# Altium PCB AVR最小系统板.PcbDoc (part 3 of 3)
Units mm, origin at the board's own origin, x right, y up, seen from the top; angles counter-clockwise.
Board outline 152.4 x 101.6 mm, 2 copper layers (Top Layer, Bottom Layer); 29 components, 54 nets, 170 pads, 0 vias.
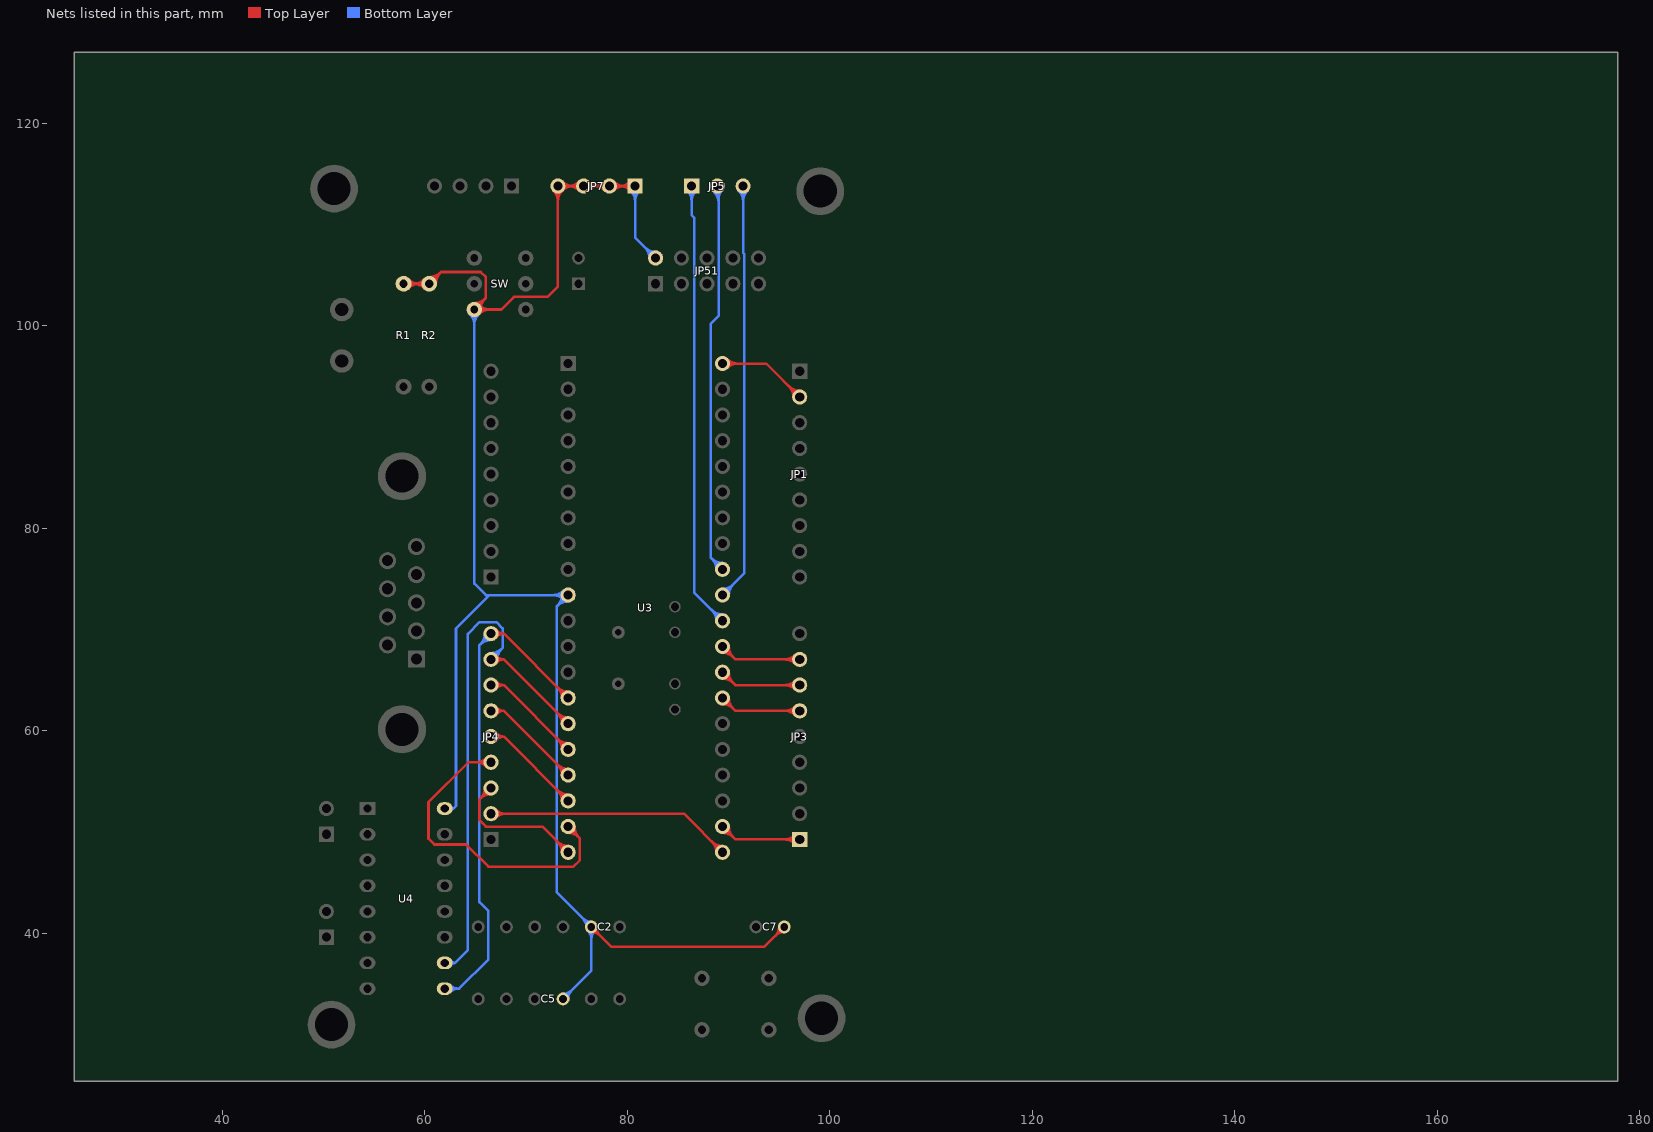
[diagram p3: the nets of this part, all layers, seen from the top]

## Nets (pads, with @x,y where several pads share a name; then routed paths per layer and width w, separated by ;. In a path a pad name is that pad's centre, name@x,y a point inside that pad or via, vN(x,y) a via of type N, cw(c..) or ccw(c..) an arc to the next point about the centre after c; other vN are vias at no path point) (continued)
NetJP3_6: JP3.6 U3.27 | length 30.7
  Top Layer w0.254: U3.27@89.408,63.246 90.678,61.976 JP3.6@97.028,61.976 ; U3.27@89.408,62.623 cw(c89.408,61.119) 90.472,62.182 ; U3.27@89.408,62.623 cw(c89.408,61.119) 90.472,62.182 ; U3.27@89.408,62.623 cw(c89.408,61.119) 90.472,62.182 ; U3.27@89.408,62.877 cw(c89.408,61.986) 90.038,62.616 ; U3.27@89.408,62.877 cw(c89.408,61.986) 90.038,62.616 ; U3.27@89.408,62.877 cw(c89.408,61.986) 90.038,62.616 ; U3.27@89.777,63.246 ccw(c90.668,63.246) 90.038,62.616 ; U3.27@89.777,63.246 ccw(c90.668,63.246) 90.038,62.616 ; U3.27@89.777,63.246 ccw(c90.668,63.246) 90.038,62.616 ; U3.27@90.031,63.246 ccw(c91.535,63.246) 90.472,62.182 ; U3.27@90.031,63.246 ccw(c91.535,63.246) 90.472,62.182 ; U3.27@90.031,63.246 ccw(c91.535,63.246) 90.472,62.182 ; 95.524,61.976 cw(c95.524,60.472) JP3.6@96.587,61.535 ; 95.524,61.976 ccw(c95.524,63.48) JP3.6@96.587,62.417 ; 95.524,61.976 cw(c95.524,60.472) JP3.6@96.587,61.535 ; 95.524,61.976 ccw(c95.524,63.48) JP3.6@96.587,62.417 ; 95.524,61.976 cw(c95.524,60.472) JP3.6@96.587,61.535 ; 95.524,61.976 ccw(c95.524,63.48) JP3.6@96.587,62.417 ; 96.137,61.976 cw(c96.137,61.085) JP3.6@96.767,61.715 ; 96.137,61.976 ccw(c96.137,62.867) JP3.6@96.767,62.237 ; 96.137,61.976 cw(c96.137,61.085) JP3.6@96.767,61.715 ; 96.137,61.976 ccw(c96.137,62.867) JP3.6@96.767,62.237 ; 96.137,61.976 cw(c96.137,61.085) JP3.6@96.767,61.715 ; 96.137,61.976 ccw(c96.137,62.867) JP3.6@96.767,62.237
NetJP3_7: JP3.7 U3.28 | length 30.7
  Top Layer w0.254: U3.28@89.408,65.786 90.678,64.516 JP3.7@97.028,64.516 ; U3.28@89.408,65.163 cw(c89.408,63.659) 90.472,64.722 ; U3.28@89.408,65.163 cw(c89.408,63.659) 90.472,64.722 ; U3.28@89.408,65.163 cw(c89.408,63.659) 90.472,64.722 ; U3.28@89.408,65.417 cw(c89.408,64.526) 90.038,65.156 ; U3.28@89.408,65.417 cw(c89.408,64.526) 90.038,65.156 ; U3.28@89.408,65.417 cw(c89.408,64.526) 90.038,65.156 ; U3.28@89.777,65.786 ccw(c90.668,65.786) 90.038,65.156 ; U3.28@89.777,65.786 ccw(c90.668,65.786) 90.038,65.156 ; U3.28@89.777,65.786 ccw(c90.668,65.786) 90.038,65.156 ; U3.28@90.031,65.786 ccw(c91.535,65.786) 90.472,64.722 ; U3.28@90.031,65.786 ccw(c91.535,65.786) 90.472,64.722 ; U3.28@90.031,65.786 ccw(c91.535,65.786) 90.472,64.722 ; 95.524,64.516 cw(c95.524,63.012) JP3.7@96.587,64.075 ; 95.524,64.516 ccw(c95.524,66.02) JP3.7@96.587,64.957 ; 95.524,64.516 cw(c95.524,63.012) JP3.7@96.587,64.075 ; 95.524,64.516 ccw(c95.524,66.02) JP3.7@96.587,64.957 ; 95.524,64.516 cw(c95.524,63.012) JP3.7@96.587,64.075 ; 95.524,64.516 ccw(c95.524,66.02) JP3.7@96.587,64.957 ; 96.137,64.516 cw(c96.137,63.625) JP3.7@96.767,64.255 ; 96.137,64.516 ccw(c96.137,65.407) JP3.7@96.767,64.777 ; 96.137,64.516 cw(c96.137,63.625) JP3.7@96.767,64.255 ; 96.137,64.516 ccw(c96.137,65.407) JP3.7@96.767,64.777 ; 96.137,64.516 cw(c96.137,63.625) JP3.7@96.767,64.255 ; 96.137,64.516 ccw(c96.137,65.407) JP3.7@96.767,64.777
NetJP4_2: JP4.2 U3.21 | length 47
  Top Layer w0.254: JP4.2@66.548,51.816 85.598,51.816 U3.21@89.408,48.006 ; JP4.2@66.809,51.555 cw(c67.439,50.925) 67.439,51.816 ; JP4.2@66.809,51.555 cw(c67.439,50.925) 67.439,51.816 ; JP4.2@66.809,51.555 cw(c67.439,50.925) 67.439,51.816 ; JP4.2@66.809,52.077 ccw(c67.439,52.707) 67.439,51.816 ; JP4.2@66.809,52.077 ccw(c67.439,52.707) 67.439,51.816 ; JP4.2@66.809,52.077 ccw(c67.439,52.707) 67.439,51.816 ; JP4.2@66.989,51.375 cw(c68.052,50.312) 68.052,51.816 ; JP4.2@66.989,51.375 cw(c68.052,50.312) 68.052,51.816 ; JP4.2@66.989,51.375 cw(c68.052,50.312) 68.052,51.816 ; JP4.2@66.989,52.257 ccw(c68.052,53.32) 68.052,51.816 ; JP4.2@66.989,52.257 ccw(c68.052,53.32) 68.052,51.816 ; JP4.2@66.989,52.257 ccw(c68.052,53.32) 68.052,51.816 ; 88.344,49.07 cw(c87.281,48.006) U3.21@88.785,48.006 ; 88.344,49.07 ccw(c89.408,50.133) U3.21@89.408,48.629 ; 88.344,49.07 cw(c87.281,48.006) U3.21@88.785,48.006 ; 88.344,49.07 ccw(c89.408,50.133) U3.21@89.408,48.629 ; 88.344,49.07 cw(c87.281,48.006) U3.21@88.785,48.006 ; 88.344,49.07 ccw(c89.408,50.133) U3.21@89.408,48.629 ; 88.778,48.636 cw(c88.148,48.006) U3.21@89.039,48.006 ; 88.778,48.636 ccw(c89.408,49.266) U3.21@89.408,48.375 ; 88.778,48.636 cw(c88.148,48.006) U3.21@89.039,48.006 ; 88.778,48.636 ccw(c89.408,49.266) U3.21@89.408,48.375 ; 88.778,48.636 cw(c88.148,48.006) U3.21@89.039,48.006 ; 88.778,48.636 ccw(c89.408,49.266) U3.21@89.408,48.375
NetJP4_3: JP4.3 U3.20 | length 36.3
  Top Layer w0.254: JP4.3@66.548,54.356 65.405,53.213 65.405,51.181 66.04,50.546 71.628,50.546 U3.20@74.168,48.006 ; 65.484,53.292 cw(c66.548,52.229) JP4.3@66.548,53.733 ; 65.484,53.292 ccw(c64.421,54.356) JP4.3@65.925,54.356 ; 65.484,53.292 cw(c66.548,52.229) JP4.3@66.548,53.733 ; 65.484,53.292 ccw(c64.421,54.356) JP4.3@65.925,54.356 ; 65.484,53.292 cw(c66.548,52.229) JP4.3@66.548,53.733 ; 65.484,53.292 ccw(c64.421,54.356) JP4.3@65.925,54.356 ; 65.918,53.726 cw(c66.548,53.096) JP4.3@66.548,53.987 ; 65.918,53.726 ccw(c65.288,54.356) JP4.3@66.179,54.356 ; 65.918,53.726 cw(c66.548,53.096) JP4.3@66.548,53.987 ; 65.918,53.726 ccw(c65.288,54.356) JP4.3@66.179,54.356 ; 65.918,53.726 cw(c66.548,53.096) JP4.3@66.548,53.987 ; 65.918,53.726 ccw(c65.288,54.356) JP4.3@66.179,54.356 ; 73.104,49.07 cw(c72.041,48.006) U3.20@73.545,48.006 ; 73.104,49.07 ccw(c74.168,50.133) U3.20@74.168,48.629 ; 73.104,49.07 cw(c72.041,48.006) U3.20@73.545,48.006 ; 73.104,49.07 ccw(c74.168,50.133) U3.20@74.168,48.629 ; 73.104,49.07 cw(c72.041,48.006) U3.20@73.545,48.006 ; 73.104,49.07 ccw(c74.168,50.133) U3.20@74.168,48.629 ; 73.538,48.636 cw(c72.908,48.006) U3.20@73.799,48.006 ; 73.538,48.636 ccw(c74.168,49.266) U3.20@74.168,48.375 ; 73.538,48.636 cw(c72.908,48.006) U3.20@73.799,48.006 ; 73.538,48.636 ccw(c74.168,49.266) U3.20@74.168,48.375 ; 73.538,48.636 cw(c72.908,48.006) U3.20@73.799,48.006 ; 73.538,48.636 ccw(c74.168,49.266) U3.20@74.168,48.375
NetJP4_4: JP4.4 U3.19 | length 54.1
  Top Layer w0.254: JP4.4@66.548,56.896 64.313,56.896 60.376,52.959 60.376,49.352 60.951,48.777 64.101,48.777 66.294,46.584 74.676,46.584 75.311,47.219 75.311,49.403 U3.19@74.168,50.546 ; 65.044,56.896 cw(c65.044,55.392) JP4.4@66.107,56.455 ; 65.044,56.896 ccw(c65.044,58.4) JP4.4@66.107,57.337 ; 65.044,56.896 cw(c65.044,55.392) JP4.4@66.107,56.455 ; 65.044,56.896 ccw(c65.044,58.4) JP4.4@66.107,57.337 ; 65.044,56.896 cw(c65.044,55.392) JP4.4@66.107,56.455 ; 65.044,56.896 ccw(c65.044,58.4) JP4.4@66.107,57.337 ; 65.657,56.896 cw(c65.657,56.005) JP4.4@66.287,56.635 ; 65.657,56.896 ccw(c65.657,57.787) JP4.4@66.287,57.157 ; 65.657,56.896 cw(c65.657,56.005) JP4.4@66.287,56.635 ; 65.657,56.896 ccw(c65.657,57.787) JP4.4@66.287,57.157 ; 65.657,56.896 cw(c65.657,56.005) JP4.4@66.287,56.635 ; 65.657,56.896 ccw(c65.657,57.787) JP4.4@66.287,57.157 ; U3.19@74.168,49.923 cw(c74.168,48.419) 75.232,49.482 ; U3.19@74.168,49.923 cw(c74.168,48.419) 75.232,49.482 ; U3.19@74.168,49.923 cw(c74.168,48.419) 75.232,49.482 ; U3.19@74.168,50.177 cw(c74.168,49.286) 74.798,49.916 ; U3.19@74.168,50.177 cw(c74.168,49.286) 74.798,49.916 ; U3.19@74.168,50.177 cw(c74.168,49.286) 74.798,49.916 ; U3.19@74.537,50.546 ccw(c75.428,50.546) 74.798,49.916 ; U3.19@74.537,50.546 ccw(c75.428,50.546) 74.798,49.916 ; U3.19@74.537,50.546 ccw(c75.428,50.546) 74.798,49.916 ; U3.19@74.791,50.546 ccw(c76.295,50.546) 75.232,49.482 ; U3.19@74.791,50.546 ccw(c76.295,50.546) 75.232,49.482 ; U3.19@74.791,50.546 ccw(c76.295,50.546) 75.232,49.482
NetJP4_5: JP4.5 U3.18 | length 30.1
  Top Layer w0.254: JP4.5@66.548,59.436 67.818,59.436 ; U3.18@74.168,53.086 67.818,59.436 ; JP4.5@66.84,59.21 cw(c67.3,58.854) 67.3,59.436 ; JP4.5@66.84,59.21 cw(c67.3,58.854) 67.3,59.436 ; JP4.5@66.84,59.21 cw(c67.3,58.854) 67.3,59.436 ; JP4.5@66.84,59.662 ccw(c67.3,60.018) 67.3,59.436 ; JP4.5@66.84,59.662 ccw(c67.3,60.018) 67.3,59.436 ; JP4.5@66.84,59.662 ccw(c67.3,60.018) 67.3,59.436 ; JP4.5@67.041,59.055 cw(c67.818,58.453) 67.818,59.436 ; JP4.5@67.041,59.055 cw(c67.818,58.453) 67.818,59.436 ; JP4.5@67.041,59.055 cw(c67.818,58.453) 67.818,59.436 ; JP4.5@67.041,59.817 ccw(c67.818,60.419) 67.818,59.436 ; JP4.5@67.041,59.817 ccw(c67.818,60.419) 67.818,59.436 ; JP4.5@67.041,59.817 ccw(c67.818,60.419) 67.818,59.436 ; 73.104,54.15 cw(c72.041,53.086) U3.18@73.545,53.086 ; 73.104,54.15 ccw(c74.168,55.213) U3.18@74.168,53.709 ; 73.104,54.15 cw(c72.041,53.086) U3.18@73.545,53.086 ; 73.104,54.15 ccw(c74.168,55.213) U3.18@74.168,53.709 ; 73.104,54.15 cw(c72.041,53.086) U3.18@73.545,53.086 ; 73.104,54.15 ccw(c74.168,55.213) U3.18@74.168,53.709 ; 73.538,53.716 cw(c72.908,53.086) U3.18@73.799,53.086 ; 73.538,53.716 ccw(c74.168,54.346) U3.18@74.168,53.455 ; 73.538,53.716 cw(c72.908,53.086) U3.18@73.799,53.086 ; 73.538,53.716 ccw(c74.168,54.346) U3.18@74.168,53.455 ; 73.538,53.716 cw(c72.908,53.086) U3.18@73.799,53.086 ; 73.538,53.716 ccw(c74.168,54.346) U3.18@74.168,53.455
NetJP4_6: JP4.6 U3.17 | length 30.1
  Top Layer w0.254: JP4.6@66.548,61.976 67.818,61.976 ; U3.17@74.168,55.626 67.818,61.976 ; JP4.6@66.84,61.75 cw(c67.3,61.394) 67.3,61.976 ; JP4.6@66.84,61.75 cw(c67.3,61.394) 67.3,61.976 ; JP4.6@66.84,61.75 cw(c67.3,61.394) 67.3,61.976 ; JP4.6@66.84,62.202 ccw(c67.3,62.558) 67.3,61.976 ; JP4.6@66.84,62.202 ccw(c67.3,62.558) 67.3,61.976 ; JP4.6@66.84,62.202 ccw(c67.3,62.558) 67.3,61.976 ; JP4.6@67.041,61.595 cw(c67.818,60.993) 67.818,61.976 ; JP4.6@67.041,61.595 cw(c67.818,60.993) 67.818,61.976 ; JP4.6@67.041,61.595 cw(c67.818,60.993) 67.818,61.976 ; JP4.6@67.041,62.357 ccw(c67.818,62.959) 67.818,61.976 ; JP4.6@67.041,62.357 ccw(c67.818,62.959) 67.818,61.976 ; JP4.6@67.041,62.357 ccw(c67.818,62.959) 67.818,61.976 ; 73.104,56.69 cw(c72.041,55.626) U3.17@73.545,55.626 ; 73.104,56.69 ccw(c74.168,57.753) U3.17@74.168,56.249 ; 73.104,56.69 cw(c72.041,55.626) U3.17@73.545,55.626 ; 73.104,56.69 ccw(c74.168,57.753) U3.17@74.168,56.249 ; 73.104,56.69 cw(c72.041,55.626) U3.17@73.545,55.626 ; 73.104,56.69 ccw(c74.168,57.753) U3.17@74.168,56.249 ; 73.538,56.256 cw(c72.908,55.626) U3.17@73.799,55.626 ; 73.538,56.256 ccw(c74.168,56.886) U3.17@74.168,55.995 ; 73.538,56.256 cw(c72.908,55.626) U3.17@73.799,55.626 ; 73.538,56.256 ccw(c74.168,56.886) U3.17@74.168,55.995 ; 73.538,56.256 cw(c72.908,55.626) U3.17@73.799,55.626 ; 73.538,56.256 ccw(c74.168,56.886) U3.17@74.168,55.995
NetJP4_7: JP4.7 U3.16 | length 30.1
  Top Layer w0.254: JP4.7@66.548,64.516 67.818,64.516 ; U3.16@74.168,58.166 67.818,64.516 ; JP4.7@66.84,64.29 cw(c67.3,63.934) 67.3,64.516 ; JP4.7@66.84,64.29 cw(c67.3,63.934) 67.3,64.516 ; JP4.7@66.84,64.29 cw(c67.3,63.934) 67.3,64.516 ; JP4.7@66.84,64.742 ccw(c67.3,65.098) 67.3,64.516 ; JP4.7@66.84,64.742 ccw(c67.3,65.098) 67.3,64.516 ; JP4.7@66.84,64.742 ccw(c67.3,65.098) 67.3,64.516 ; JP4.7@67.041,64.135 cw(c67.818,63.533) 67.818,64.516 ; JP4.7@67.041,64.135 cw(c67.818,63.533) 67.818,64.516 ; JP4.7@67.041,64.135 cw(c67.818,63.533) 67.818,64.516 ; JP4.7@67.041,64.897 ccw(c67.818,65.499) 67.818,64.516 ; JP4.7@67.041,64.897 ccw(c67.818,65.499) 67.818,64.516 ; JP4.7@67.041,64.897 ccw(c67.818,65.499) 67.818,64.516 ; 73.104,59.23 cw(c72.041,58.166) U3.16@73.545,58.166 ; 73.104,59.23 ccw(c74.168,60.293) U3.16@74.168,58.789 ; 73.104,59.23 cw(c72.041,58.166) U3.16@73.545,58.166 ; 73.104,59.23 ccw(c74.168,60.293) U3.16@74.168,58.789 ; 73.104,59.23 cw(c72.041,58.166) U3.16@73.545,58.166 ; 73.104,59.23 ccw(c74.168,60.293) U3.16@74.168,58.789 ; 73.538,58.796 cw(c72.908,58.166) U3.16@73.799,58.166 ; 73.538,58.796 ccw(c74.168,59.426) U3.16@74.168,58.535 ; 73.538,58.796 cw(c72.908,58.166) U3.16@73.799,58.166 ; 73.538,58.796 ccw(c74.168,59.426) U3.16@74.168,58.535 ; 73.538,58.796 cw(c72.908,58.166) U3.16@73.799,58.166 ; 73.538,58.796 ccw(c74.168,59.426) U3.16@74.168,58.535
NetJP4_8: JP4.8 U3.15 U4.10 | length 86.2
  Top Layer w0.254: JP4.8@66.548,67.056 67.818,67.056 ; U3.15@74.168,60.706 67.818,67.056 ; JP4.8@66.84,66.83 cw(c67.3,66.474) 67.3,67.056 ; JP4.8@66.84,66.83 cw(c67.3,66.474) 67.3,67.056 ; JP4.8@66.84,66.83 cw(c67.3,66.474) 67.3,67.056 ; JP4.8@66.84,67.282 ccw(c67.3,67.638) 67.3,67.056 ; JP4.8@66.84,67.282 ccw(c67.3,67.638) 67.3,67.056 ; JP4.8@66.84,67.282 ccw(c67.3,67.638) 67.3,67.056 ; JP4.8@67.041,66.675 cw(c67.818,66.073) 67.818,67.056 ; JP4.8@67.041,66.675 cw(c67.818,66.073) 67.818,67.056 ; JP4.8@67.041,66.675 cw(c67.818,66.073) 67.818,67.056 ; JP4.8@67.041,67.437 ccw(c67.818,68.039) 67.818,67.056 ; JP4.8@67.041,67.437 ccw(c67.818,68.039) 67.818,67.056 ; JP4.8@67.041,67.437 ccw(c67.818,68.039) 67.818,67.056 ; 73.104,61.77 cw(c72.041,60.706) U3.15@73.545,60.706 ; 73.104,61.77 ccw(c74.168,62.833) U3.15@74.168,61.329 ; 73.104,61.77 cw(c72.041,60.706) U3.15@73.545,60.706 ; 73.104,61.77 ccw(c74.168,62.833) U3.15@74.168,61.329 ; 73.104,61.77 cw(c72.041,60.706) U3.15@73.545,60.706 ; 73.104,61.77 ccw(c74.168,62.833) U3.15@74.168,61.329 ; 73.538,61.336 cw(c72.908,60.706) U3.15@73.799,60.706 ; 73.538,61.336 ccw(c74.168,61.966) U3.15@74.168,61.075 ; 73.538,61.336 cw(c72.908,60.706) U3.15@73.799,60.706 ; 73.538,61.336 ccw(c74.168,61.966) U3.15@74.168,61.075 ; 73.538,61.336 cw(c72.908,60.706) U3.15@73.799,60.706 ; 73.538,61.336 ccw(c74.168,61.966) U3.15@74.168,61.075
  Bottom Layer w0.254: U4.10@61.972,37.083 62.992,37.083 ; JP4.8@66.548,67.056 67.691,68.199 67.691,70.104 67.068,70.727 65.405,70.727 64.262,69.584 64.262,38.353 62.992,37.083 ; U4.10@62.567,36.836 cw(c62.992,36.594) 62.992,37.083 ; U4.10@62.567,36.836 cw(c62.992,36.594) 62.992,37.083 ; U4.10@62.567,36.836 cw(c62.992,36.594) 62.992,37.083 ; U4.10@62.567,37.33 ccw(c62.992,37.572) 62.992,37.083 ; U4.10@62.567,37.33 ccw(c62.992,37.572) 62.992,37.083 ; U4.10@62.567,37.33 ccw(c62.992,37.572) 62.992,37.083 ; JP4.8@66.548,67.425 ccw(c66.548,68.316) 67.178,67.686 ; JP4.8@66.548,67.425 ccw(c66.548,68.316) 67.178,67.686 ; JP4.8@66.548,67.425 ccw(c66.548,68.316) 67.178,67.686 ; JP4.8@66.548,67.679 ccw(c66.548,69.183) 67.612,68.12 ; JP4.8@66.548,67.679 ccw(c66.548,69.183) 67.612,68.12 ; JP4.8@66.548,67.679 ccw(c66.548,69.183) 67.612,68.12 ; JP4.8@66.917,67.056 cw(c67.808,67.056) 67.178,67.686 ; JP4.8@66.917,67.056 cw(c67.808,67.056) 67.178,67.686 ; JP4.8@66.917,67.056 cw(c67.808,67.056) 67.178,67.686 ; JP4.8@67.171,67.056 cw(c68.675,67.056) 67.612,68.12 ; JP4.8@67.171,67.056 cw(c68.675,67.056) 67.612,68.12 ; JP4.8@67.171,67.056 cw(c68.675,67.056) 67.612,68.12
NetJP5_1: JP5.1 U3.30 | length 66.8
  Bottom Layer w0.254: JP5.1@86.36,113.792 86.36,110.922 86.614,110.668 86.614,73.66 U3.30@89.408,70.866 ; JP5.1@85.919,113.351 cw(c84.856,112.288) 86.36,112.288 ; JP5.1@85.919,113.351 cw(c84.856,112.288) 86.36,112.288 ; JP5.1@85.919,113.351 cw(c84.856,112.288) 86.36,112.288 ; JP5.1@86.099,113.531 cw(c85.469,112.901) 86.36,112.901 ; JP5.1@86.099,113.531 cw(c85.469,112.901) 86.36,112.901 ; JP5.1@86.099,113.531 cw(c85.469,112.901) 86.36,112.901 ; 86.36,112.288 cw(c87.864,112.288) JP5.1@86.801,113.351 ; 86.36,112.288 cw(c87.864,112.288) JP5.1@86.801,113.351 ; 86.36,112.288 cw(c87.864,112.288) JP5.1@86.801,113.351 ; 86.36,112.901 cw(c87.251,112.901) JP5.1@86.621,113.531 ; 86.36,112.901 cw(c87.251,112.901) JP5.1@86.621,113.531 ; 86.36,112.901 cw(c87.251,112.901) JP5.1@86.621,113.531 ; 88.344,71.93 cw(c87.281,70.866) U3.30@88.785,70.866 ; 88.344,71.93 ccw(c89.408,72.993) U3.30@89.408,71.489 ; 88.344,71.93 cw(c87.281,70.866) U3.30@88.785,70.866 ; 88.344,71.93 ccw(c89.408,72.993) U3.30@89.408,71.489 ; 88.344,71.93 cw(c87.281,70.866) U3.30@88.785,70.866 ; 88.344,71.93 ccw(c89.408,72.993) U3.30@89.408,71.489 ; 88.778,71.496 cw(c88.148,70.866) U3.30@89.039,70.866 ; 88.778,71.496 ccw(c89.408,72.126) U3.30@89.408,71.235 ; 88.778,71.496 cw(c88.148,70.866) U3.30@89.039,70.866 ; 88.778,71.496 ccw(c89.408,72.126) U3.30@89.408,71.235 ; 88.778,71.496 cw(c88.148,70.866) U3.30@89.039,70.866 ; 88.778,71.496 ccw(c89.408,72.126) U3.30@89.408,71.235
NetJP5_2: JP5.2 U3.32 | length 60.3
  Bottom Layer w0.254: JP5.2@88.9,113.792 89.027,113.792 89.027,100.965 88.265,100.203 88.265,77.089 U3.32@89.408,75.946 ; 88.344,77.01 cw(c87.281,75.946) U3.32@88.785,75.946 ; 88.344,77.01 ccw(c89.408,78.073) U3.32@89.408,76.569 ; 88.344,77.01 cw(c87.281,75.946) U3.32@88.785,75.946 ; 88.344,77.01 ccw(c89.408,78.073) U3.32@89.408,76.569 ; 88.344,77.01 cw(c87.281,75.946) U3.32@88.785,75.946 ; 88.344,77.01 ccw(c89.408,78.073) U3.32@89.408,76.569 ; JP5.2@88.459,113.351 cw(c87.089,111.981) 89.027,111.981 ; JP5.2@88.459,113.351 cw(c87.089,111.981) 89.027,111.981 ; JP5.2@88.459,113.351 cw(c87.089,111.981) 89.027,111.981 ; JP5.2@88.639,113.531 cw(c87.703,112.595) 89.027,112.595 ; JP5.2@88.639,113.531 cw(c87.703,112.595) 89.027,112.595 ; JP5.2@88.639,113.531 cw(c87.703,112.595) 89.027,112.595 ; 88.778,76.576 cw(c88.148,75.946) U3.32@89.039,75.946 ; 88.778,76.576 ccw(c89.408,77.206) U3.32@89.408,76.315 ; 88.778,76.576 cw(c88.148,75.946) U3.32@89.039,75.946 ; 88.778,76.576 ccw(c89.408,77.206) U3.32@89.408,76.315 ; 88.778,76.576 cw(c88.148,75.946) U3.32@89.039,75.946 ; 88.778,76.576 ccw(c89.408,77.206) U3.32@89.408,76.315 ; 89.027,112.595 cw(c90.097,112.595) JP5.2@89.341,113.351 ; 89.027,112.595 cw(c90.097,112.595) JP5.2@89.341,113.351 ; 89.027,112.595 cw(c90.097,112.595) JP5.2@89.341,113.351
NetJP5_3: JP5.3 U3.31 | length 63.9
  Bottom Layer w0.254: U3.31@89.408,73.406 91.567,75.565 91.567,107.061 91.44,107.188 JP5.3@91.44,113.792 ; U3.31@89.408,73.775 ccw(c89.408,74.666) 90.038,74.036 ; U3.31@89.408,73.775 ccw(c89.408,74.666) 90.038,74.036 ; U3.31@89.408,73.775 ccw(c89.408,74.666) 90.038,74.036 ; U3.31@89.408,74.029 ccw(c89.408,75.533) 90.472,74.47 ; U3.31@89.408,74.029 ccw(c89.408,75.533) 90.472,74.47 ; U3.31@89.408,74.029 ccw(c89.408,75.533) 90.472,74.47 ; U3.31@89.777,73.406 cw(c90.668,73.406) 90.038,74.036 ; U3.31@89.777,73.406 cw(c90.668,73.406) 90.038,74.036 ; U3.31@89.777,73.406 cw(c90.668,73.406) 90.038,74.036 ; U3.31@90.031,73.406 cw(c91.535,73.406) 90.472,74.47 ; U3.31@90.031,73.406 cw(c91.535,73.406) 90.472,74.47 ; U3.31@90.031,73.406 cw(c91.535,73.406) 90.472,74.47 ; JP5.3@90.999,113.351 cw(c89.936,112.288) 91.44,112.288 ; JP5.3@90.999,113.351 cw(c89.936,112.288) 91.44,112.288 ; JP5.3@90.999,113.351 cw(c89.936,112.288) 91.44,112.288 ; JP5.3@91.179,113.531 cw(c90.549,112.901) 91.44,112.901 ; JP5.3@91.179,113.531 cw(c90.549,112.901) 91.44,112.901 ; JP5.3@91.179,113.531 cw(c90.549,112.901) 91.44,112.901 ; 91.44,112.288 cw(c92.944,112.288) JP5.3@91.881,113.351 ; 91.44,112.288 cw(c92.944,112.288) JP5.3@91.881,113.351 ; 91.44,112.288 cw(c92.944,112.288) JP5.3@91.881,113.351 ; 91.44,112.901 cw(c92.331,112.901) JP5.3@91.701,113.531 ; 91.44,112.901 cw(c92.331,112.901) JP5.3@91.701,113.531 ; 91.44,112.901 cw(c92.331,112.901) JP5.3@91.701,113.531
PA0: JP1.2 U3.40 | length 31.6
  Top Layer w0.254: U3.40@89.408,96.266 93.726,96.266 JP1.2@97.028,92.964 ; U3.40@89.669,96.005 cw(c90.299,95.375) 90.299,96.266 ; U3.40@89.669,96.005 cw(c90.299,95.375) 90.299,96.266 ; U3.40@89.669,96.005 cw(c90.299,95.375) 90.299,96.266 ; U3.40@89.669,96.527 ccw(c90.299,97.157) 90.299,96.266 ; U3.40@89.669,96.527 ccw(c90.299,97.157) 90.299,96.266 ; U3.40@89.669,96.527 ccw(c90.299,97.157) 90.299,96.266 ; U3.40@89.849,95.825 cw(c90.912,94.762) 90.912,96.266 ; U3.40@89.849,95.825 cw(c90.912,94.762) 90.912,96.266 ; U3.40@89.849,95.825 cw(c90.912,94.762) 90.912,96.266 ; U3.40@89.849,96.707 ccw(c90.912,97.77) 90.912,96.266 ; U3.40@89.849,96.707 ccw(c90.912,97.77) 90.912,96.266 ; U3.40@89.849,96.707 ccw(c90.912,97.77) 90.912,96.266 ; 95.964,94.028 cw(c94.901,92.964) JP1.2@96.405,92.964 ; 95.964,94.028 ccw(c97.028,95.091) JP1.2@97.028,93.587 ; 95.964,94.028 cw(c94.901,92.964) JP1.2@96.405,92.964 ; 95.964,94.028 ccw(c97.028,95.091) JP1.2@97.028,93.587 ; 95.964,94.028 cw(c94.901,92.964) JP1.2@96.405,92.964 ; 95.964,94.028 ccw(c97.028,95.091) JP1.2@97.028,93.587 ; 96.398,93.594 cw(c95.768,92.964) JP1.2@96.659,92.964 ; 96.398,93.594 ccw(c97.028,94.224) JP1.2@97.028,93.333 ; 96.398,93.594 cw(c95.768,92.964) JP1.2@96.659,92.964 ; 96.398,93.594 ccw(c97.028,94.224) JP1.2@97.028,93.333 ; 96.398,93.594 cw(c95.768,92.964) JP1.2@96.659,92.964 ; 96.398,93.594 ccw(c97.028,94.224) JP1.2@97.028,93.333
PC0: JP3.1 U3.22 | length 30.7
  Top Layer w0.254: U3.22@89.408,50.546 90.678,49.276 JP3.1@97.028,49.276 ; U3.22@89.408,49.923 cw(c89.408,48.419) 90.472,49.482 ; U3.22@89.408,49.923 cw(c89.408,48.419) 90.472,49.482 ; U3.22@89.408,49.923 cw(c89.408,48.419) 90.472,49.482 ; U3.22@89.408,50.177 cw(c89.408,49.286) 90.038,49.916 ; U3.22@89.408,50.177 cw(c89.408,49.286) 90.038,49.916 ; U3.22@89.408,50.177 cw(c89.408,49.286) 90.038,49.916 ; U3.22@89.777,50.546 ccw(c90.668,50.546) 90.038,49.916 ; U3.22@89.777,50.546 ccw(c90.668,50.546) 90.038,49.916 ; U3.22@89.777,50.546 ccw(c90.668,50.546) 90.038,49.916 ; U3.22@90.031,50.546 ccw(c91.535,50.546) 90.472,49.482 ; U3.22@90.031,50.546 ccw(c91.535,50.546) 90.472,49.482 ; U3.22@90.031,50.546 ccw(c91.535,50.546) 90.472,49.482 ; 95.524,49.276 cw(c95.524,47.772) JP3.1@96.587,48.835 ; 95.524,49.276 ccw(c95.524,50.78) JP3.1@96.587,49.717 ; 95.524,49.276 cw(c95.524,47.772) JP3.1@96.587,48.835 ; 95.524,49.276 ccw(c95.524,50.78) JP3.1@96.587,49.717 ; 95.524,49.276 cw(c95.524,47.772) JP3.1@96.587,48.835 ; 95.524,49.276 ccw(c95.524,50.78) JP3.1@96.587,49.717 ; 96.137,49.276 cw(c96.137,48.385) JP3.1@96.767,49.015 ; 96.137,49.276 ccw(c96.137,50.167) JP3.1@96.767,49.537 ; 96.137,49.276 cw(c96.137,48.385) JP3.1@96.767,49.015 ; 96.137,49.276 ccw(c96.137,50.167) JP3.1@96.767,49.537 ; 96.137,49.276 cw(c96.137,48.385) JP3.1@96.767,49.015 ; 96.137,49.276 ccw(c96.137,50.167) JP3.1@96.767,49.537
PC7: JP3.8 U3.29 | length 30.7
  Top Layer w0.254: U3.29@89.408,68.326 90.678,67.056 JP3.8@97.028,67.056 ; U3.29@89.408,67.703 cw(c89.408,66.199) 90.472,67.262 ; U3.29@89.408,67.703 cw(c89.408,66.199) 90.472,67.262 ; U3.29@89.408,67.703 cw(c89.408,66.199) 90.472,67.262 ; U3.29@89.408,67.957 cw(c89.408,67.066) 90.038,67.696 ; U3.29@89.408,67.957 cw(c89.408,67.066) 90.038,67.696 ; U3.29@89.408,67.957 cw(c89.408,67.066) 90.038,67.696 ; U3.29@89.777,68.326 ccw(c90.668,68.326) 90.038,67.696 ; U3.29@89.777,68.326 ccw(c90.668,68.326) 90.038,67.696 ; U3.29@89.777,68.326 ccw(c90.668,68.326) 90.038,67.696 ; U3.29@90.031,68.326 ccw(c91.535,68.326) 90.472,67.262 ; U3.29@90.031,68.326 ccw(c91.535,68.326) 90.472,67.262 ; U3.29@90.031,68.326 ccw(c91.535,68.326) 90.472,67.262 ; 95.524,67.056 cw(c95.524,65.552) JP3.8@96.587,66.615 ; 95.524,67.056 ccw(c95.524,68.56) JP3.8@96.587,67.497 ; 95.524,67.056 cw(c95.524,65.552) JP3.8@96.587,66.615 ; 95.524,67.056 ccw(c95.524,68.56) JP3.8@96.587,67.497 ; 95.524,67.056 cw(c95.524,65.552) JP3.8@96.587,66.615 ; 95.524,67.056 ccw(c95.524,68.56) JP3.8@96.587,67.497 ; 96.137,67.056 cw(c96.137,66.165) JP3.8@96.767,66.795 ; 96.137,67.056 ccw(c96.137,67.947) JP3.8@96.767,67.317 ; 96.137,67.056 cw(c96.137,66.165) JP3.8@96.767,66.795 ; 96.137,67.056 ccw(c96.137,67.947) JP3.8@96.767,67.317 ; 96.137,67.056 cw(c96.137,66.165) JP3.8@96.767,66.795 ; 96.137,67.056 ccw(c96.137,67.947) JP3.8@96.767,67.317
PD0: JP4.9 U3.14 U4.9 | length 85.6
  Top Layer w0.254: JP4.9@66.548,69.596 67.818,69.596 ; U3.14@74.168,63.246 67.818,69.596 ; JP4.9@66.84,69.37 cw(c67.3,69.014) 67.3,69.596 ; JP4.9@66.84,69.37 cw(c67.3,69.014) 67.3,69.596 ; JP4.9@66.84,69.37 cw(c67.3,69.014) 67.3,69.596 ; JP4.9@66.84,69.822 ccw(c67.3,70.178) 67.3,69.596 ; JP4.9@66.84,69.822 ccw(c67.3,70.178) 67.3,69.596 ; JP4.9@66.84,69.822 ccw(c67.3,70.178) 67.3,69.596 ; JP4.9@67.041,69.215 cw(c67.818,68.613) 67.818,69.596 ; JP4.9@67.041,69.215 cw(c67.818,68.613) 67.818,69.596 ; JP4.9@67.041,69.215 cw(c67.818,68.613) 67.818,69.596 ; JP4.9@67.041,69.977 ccw(c67.818,70.579) 67.818,69.596 ; JP4.9@67.041,69.977 ccw(c67.818,70.579) 67.818,69.596 ; JP4.9@67.041,69.977 ccw(c67.818,70.579) 67.818,69.596 ; 73.104,64.31 cw(c72.041,63.246) U3.14@73.545,63.246 ; 73.104,64.31 ccw(c74.168,65.373) U3.14@74.168,63.869 ; 73.104,64.31 cw(c72.041,63.246) U3.14@73.545,63.246 ; 73.104,64.31 ccw(c74.168,65.373) U3.14@74.168,63.869 ; 73.104,64.31 cw(c72.041,63.246) U3.14@73.545,63.246 ; 73.104,64.31 ccw(c74.168,65.373) U3.14@74.168,63.869 ; 73.538,63.876 cw(c72.908,63.246) U3.14@73.799,63.246 ; 73.538,63.876 ccw(c74.168,64.506) U3.14@74.168,63.615 ; 73.538,63.876 cw(c72.908,63.246) U3.14@73.799,63.246 ; 73.538,63.876 ccw(c74.168,64.506) U3.14@74.168,63.615 ; 73.538,63.876 cw(c72.908,63.246) U3.14@73.799,63.246 ; 73.538,63.876 ccw(c74.168,64.506) U3.14@74.168,63.615
  Bottom Layer w0.254: U4.9@61.972,34.543 63.397,34.543 66.294,37.44 66.294,42.189 65.405,43.078 65.405,68.453 JP4.9@66.548,69.596 ; U4.9@62.487,34.191 cw(c63.337,33.341) 63.337,34.543 ; U4.9@62.487,34.191 cw(c63.337,33.341) 63.337,34.543 ; U4.9@62.487,34.191 cw(c63.337,33.341) 63.337,34.543 ; U4.9@62.487,34.895 ccw(c63.337,35.745) 63.337,34.543 ; U4.9@62.487,34.895 ccw(c63.337,35.745) 63.337,34.543 ; U4.9@62.487,34.895 ccw(c63.337,35.745) 63.337,34.543 ; 65.484,68.532 cw(c66.548,67.469) JP4.9@66.548,68.973 ; 65.484,68.532 ccw(c64.421,69.596) JP4.9@65.925,69.596 ; 65.484,68.532 cw(c66.548,67.469) JP4.9@66.548,68.973 ; 65.484,68.532 ccw(c64.421,69.596) JP4.9@65.925,69.596 ; 65.484,68.532 cw(c66.548,67.469) JP4.9@66.548,68.973 ; 65.484,68.532 ccw(c64.421,69.596) JP4.9@65.925,69.596 ; 65.918,68.966 cw(c66.548,68.336) JP4.9@66.548,69.227 ; 65.918,68.966 ccw(c65.288,69.596) JP4.9@66.179,69.596 ; 65.918,68.966 cw(c66.548,68.336) JP4.9@66.548,69.227 ; 65.918,68.966 ccw(c65.288,69.596) JP4.9@66.179,69.596 ; 65.918,68.966 cw(c66.548,68.336) JP4.9@66.548,69.227 ; 65.918,68.966 ccw(c65.288,69.596) JP4.9@66.179,69.596
VCC: C2.2 C5.1 C7.1 JP7.1 JP7.2 JP7.3 JP7.4 JP51.2 R1.1 R2.1 SW.2 U3.10 U4.16 | length 389.3
  Top Layer w0.254: R1.1@57.911,104.144 R2.1@60.451,104.144 61.616,105.308 65.532,105.308 66.04,104.8 66.04,102.743 SW.2@64.897,101.6 67.564,101.6 68.809,102.845 72.136,102.845 73.152,103.861 JP7.4@73.152,113.792 JP7.3@75.692,113.792 JP7.2@78.232,113.792 JP7.1@80.772,113.792 ; SW.2@65.166,101.331 cw(c65.817,100.68) 65.817,101.6 cw(c65.817,102.52) SW.2@65.166,101.869 ; SW.2@65.346,101.151 cw(c66.43,100.067) 66.43,101.6 cw(c66.43,103.133) SW.2@65.346,102.049 ; C2.2@76.454,40.64 78.41,38.684 93.548,38.684 C7.1@95.504,40.64 ; R1.1@58.198,103.856 cw(c58.892,103.163) 58.892,104.144 ; R1.1@58.198,103.856 cw(c58.892,103.163) 58.892,104.144 ; R1.1@58.198,103.856 cw(c58.892,103.163) 58.892,104.144 ; R1.1@58.198,104.431 ccw(c58.892,105.125) 58.892,104.144 ; R1.1@58.198,104.431 ccw(c58.892,105.125) 58.892,104.144 ; R1.1@58.198,104.431 ccw(c58.892,105.125) 58.892,104.144 ; R1.1@58.378,103.677 cw(c59.505,102.549) 59.505,104.144 ; R1.1@58.378,103.677 cw(c59.505,102.549) 59.505,104.144 ; R1.1@58.378,103.677 cw(c59.505,102.549) 59.505,104.144 ; R1.1@58.378,104.611 ccw(c59.505,105.738) 59.505,104.144 ; R1.1@58.378,104.611 ccw(c59.505,105.738) 59.505,104.144 ; R1.1@58.378,104.611 ccw(c59.505,105.738) 59.505,104.144 ; 58.857,104.144 cw(c58.857,102.549) R2.1@59.984,103.677 ; 58.857,104.144 ccw(c58.857,105.738) R2.1@59.984,104.611 ; 58.857,104.144 cw(c58.857,102.549) R2.1@59.984,103.677 ; 58.857,104.144 ccw(c58.857,105.738) R2.1@59.984,104.611 ; 58.857,104.144 cw(c58.857,102.549) R2.1@59.984,103.677 ; 58.857,104.144 ccw(c58.857,105.738) R2.1@59.984,104.611 ; 59.47,104.144 cw(c59.47,103.163) R2.1@60.164,103.856 ; 59.47,104.144 ccw(c59.47,105.125) R2.1@60.164,104.431 ; 59.47,104.144 cw(c59.47,103.163) R2.1@60.164,103.856 ; 59.47,104.144 ccw(c59.47,105.125) R2.1@60.164,104.431 ; 59.47,104.144 cw(c59.47,103.163) R2.1@60.164,103.856 ; 59.47,104.144 ccw(c59.47,105.125) R2.1@60.164,104.431 ; R2.1@60.451,104.55 ccw(c60.451,105.531) 61.145,104.838 ; R2.1@60.451,104.55 ccw(c60.451,105.531) 61.145,104.838 ; R2.1@60.451,104.55 ccw(c60.451,105.531) 61.145,104.838 ; R2.1@60.451,104.804 ccw(c60.451,106.399) 61.578,105.271 ; R2.1@60.451,104.804 ccw(c60.451,106.399) 61.578,105.271 ; R2.1@60.451,104.804 ccw(c60.451,106.399) 61.578,105.271 ; R2.1@60.857,104.144 cw(c61.839,104.144) 61.145,104.838 ; R2.1@60.857,104.144 cw(c61.839,104.144) 61.145,104.838 ; R2.1@60.857,104.144 cw(c61.839,104.144) 61.145,104.838 ; R2.1@61.111,104.144 cw(c62.706,104.144) 61.578,105.271 ; R2.1@61.111,104.144 cw(c62.706,104.144) 61.578,105.271 ; R2.1@61.111,104.144 cw(c62.706,104.144) 61.578,105.271 ; SW.2@64.897,101.981 ccw(c64.897,102.901) 65.547,102.25 ; SW.2@64.897,101.981 ccw(c64.897,102.901) 65.547,102.25 ; SW.2@64.897,101.981 ccw(c64.897,102.901) 65.547,102.25 ; SW.2@64.897,102.235 ccw(c64.897,103.768) 65.981,102.684 ; SW.2@64.897,102.235 ccw(c64.897,103.768) 65.981,102.684 ; SW.2@64.897,102.235 ccw(c64.897,103.768) 65.981,102.684 ; SW.2@65.278,101.6 cw(c66.198,101.6) 65.547,102.25 ; SW.2@65.278,101.6 cw(c66.198,101.6) 65.547,102.25 ; SW.2@65.278,101.6 cw(c66.198,101.6) 65.547,102.25 ; SW.2@65.532,101.6 cw(c67.065,101.6) 65.981,102.684 ; SW.2@65.532,101.6 cw(c67.065,101.6) 65.981,102.684 ; SW.2@65.532,101.6 cw(c67.065,101.6) 65.981,102.684 ; JP7.4@72.711,113.351 cw(c71.648,112.288) 73.152,112.288 ; JP7.4@72.711,113.351 cw(c71.648,112.288) 73.152,112.288 ; JP7.4@72.711,113.351 cw(c71.648,112.288) 73.152,112.288 ; JP7.4@72.891,113.531 cw(c72.261,112.901) 73.152,112.901 ; JP7.4@72.891,113.531 cw(c72.261,112.901) 73.152,112.901 ; JP7.4@72.891,113.531 cw(c72.261,112.901) 73.152,112.901 ; 73.152,112.288 cw(c74.656,112.288) JP7.4@73.593,113.351 ; 73.152,112.288 cw(c74.656,112.288) JP7.4@73.593,113.351 ; 73.152,112.288 cw(c74.656,112.288) JP7.4@73.593,113.351 ; 73.152,112.901 cw(c74.043,112.901) JP7.4@73.413,113.531 ; 73.152,112.901 cw(c74.043,112.901) JP7.4@73.413,113.531 ; 73.152,112.901 cw(c74.043,112.901) JP7.4@73.413,113.531 ; JP7.4@73.413,113.531 cw(c74.043,112.901) 74.043,113.792 ; JP7.4@73.413,113.531 cw(c74.043,112.901) 74.043,113.792 ; JP7.4@73.413,113.531 cw(c74.043,112.901) 74.043,113.792 ; JP7.4@73.413,114.053 ccw(c74.043,114.683) 74.043,113.792 ; JP7.4@73.413,114.053 ccw(c74.043,114.683) 74.043,113.792 ; JP7.4@73.413,114.053 ccw(c74.043,114.683) 74.043,113.792 ; JP7.4@73.593,113.351 cw(c74.656,112.288) 74.656,113.792 ; JP7.4@73.593,113.351 cw(c74.656,112.288) 74.656,113.792 ; JP7.4@73.593,113.351 cw(c74.656,112.288) 74.656,113.792 ; JP7.4@73.593,114.233 ccw(c74.656,115.296) 74.656,113.792 ; JP7.4@73.593,114.233 ccw(c74.656,115.296) 74.656,113.792 ; JP7.4@73.593,114.233 ccw(c74.656,115.296) 74.656,113.792 ; 74.188,113.792 cw(c74.188,112.288) JP7.3@75.251,113.351 ; 74.188,113.792 ccw(c74.188,115.296) JP7.3@75.251,114.233 ; 74.188,113.792 cw(c74.188,112.288) JP7.3@75.251,113.351 ; 74.188,113.792 ccw(c74.188,115.296) JP7.3@75.251,114.233 ; 74.188,113.792 cw(c74.188,112.288) JP7.3@75.251,113.351 ; 74.188,113.792 ccw(c74.188,115.296) JP7.3@75.251,114.233 ; 74.801,113.792 cw(c74.801,112.901) JP7.3@75.431,113.531 ; 74.801,113.792 ccw(c74.801,114.683) JP7.3@75.431,114.053 ; 74.801,113.792 cw(c74.801,112.901) JP7.3@75.431,113.531 ; 74.801,113.792 ccw(c74.801,114.683) JP7.3@75.431,114.053 ; 74.801,113.792 cw(c74.801,112.901) JP7.3@75.431,113.531 ; 74.801,113.792 ccw(c74.801,114.683) JP7.3@75.431,114.053 ; JP7.3@75.953,113.531 cw(c76.583,112.901) 76.583,113.792 ; JP7.3@75.953,113.531 cw(c76.583,112.901) 76.583,113.792 ; JP7.3@75.953,113.531 cw(c76.583,112.901) 76.583,113.792 ; JP7.3@75.953,114.053 ccw(c76.583,114.683) 76.583,113.792 ; JP7.3@75.953,114.053 ccw(c76.583,114.683) 76.583,113.792 ; JP7.3@75.953,114.053 ccw(c76.583,114.683) 76.583,113.792 ; JP7.3@76.133,113.351 cw(c77.196,112.288) 77.196,113.792 ; JP7.3@76.133,113.351 cw(c77.196,112.288) 77.196,113.792 ; JP7.3@76.133,113.351 cw(c77.196,112.288) 77.196,113.792 ; JP7.3@76.133,114.233 ccw(c77.196,115.296) 77.196,113.792 ; JP7.3@76.133,114.233 ccw(c77.196,115.296) 77.196,113.792 ; JP7.3@76.133,114.233 ccw(c77.196,115.296) 77.196,113.792 ; C2.2@76.454,40.132 cw(c76.454,38.906) 77.321,39.773 ; C2.2@76.454,40.132 cw(c76.454,38.906) 77.321,39.773 ; C2.2@76.454,40.132 cw(c76.454,38.906) 77.321,39.773 ; 76.728,113.792 cw(c76.728,112.288) JP7.2@77.791,113.351 ; 76.728,113.792 ccw(c76.728,115.296) JP7.2@77.791,114.233 ; 76.728,113.792 cw(c76.728,112.288) JP7.2@77.791,113.351 ; 76.728,113.792 ccw(c76.728,115.296) JP7.2@77.791,114.233 ; 76.728,113.792 cw(c76.728,112.288) JP7.2@77.791,113.351 ; 76.728,113.792 ccw(c76.728,115.296) JP7.2@77.791,114.233 ; C2.2@76.962,40.64 ccw(c78.188,40.64) 77.321,39.773 ; C2.2@76.962,40.64 ccw(c78.188,40.64) 77.321,39.773 ; C2.2@76.962,40.64 ccw(c78.188,40.64) 77.321,39.773 ; 77.341,113.792 cw(c77.341,112.901) JP7.2@77.971,113.531 ; 77.341,113.792 ccw(c77.341,114.683) JP7.2@77.971,114.053 ; 77.341,113.792 cw(c77.341,112.901) JP7.2@77.971,113.531 ; 77.341,113.792 ccw(c77.341,114.683) JP7.2@77.971,114.053 ; 77.341,113.792 cw(c77.341,112.901) JP7.2@77.971,113.531 ; 77.341,113.792 ccw(c77.341,114.683) JP7.2@77.971,114.053 ; JP7.2@78.493,113.531 cw(c79.123,112.901) 79.123,113.792 ; JP7.2@78.493,113.531 cw(c79.123,112.901) 79.123,113.792 ; JP7.2@78.493,113.531 cw(c79.123,112.901) 79.123,113.792 ; JP7.2@78.493,114.053 ccw(c79.123,114.683) 79.123,113.792 ; JP7.2@78.493,114.053 ccw(c79.123,114.683) 79.123,113.792 ; JP7.2@78.493,114.053 ccw(c79.123,114.683) 79.123,113.792 ; JP7.2@78.673,113.351 cw(c79.736,112.288) 79.736,113.792 ; JP7.2@78.673,113.351 cw(c79.736,112.288) 79.736,113.792 ; JP7.2@78.673,113.351 cw(c79.736,112.288) 79.736,113.792 ; JP7.2@78.673,114.233 ccw(c79.736,115.296) 79.736,113.792 ; JP7.2@78.673,114.233 ccw(c79.736,115.296) 79.736,113.792 ; JP7.2@78.673,114.233 ccw(c79.736,115.296) 79.736,113.792 ; 79.268,113.792 cw(c79.268,112.288) JP7.1@80.331,113.351 ; 79.268,113.792 ccw(c79.268,115.296) JP7.1@80.331,114.233 ; 79.268,113.792 cw(c79.268,112.288) JP7.1@80.331,113.351 ; 79.268,113.792 ccw(c79.268,115.296) JP7.1@80.331,114.233 ; 79.268,113.792 cw(c79.268,112.288) JP7.1@80.331,113.351 ; 79.268,113.792 ccw(c79.268,115.296) JP7.1@80.331,114.233 ; 79.881,113.792 cw(c79.881,112.901) JP7.1@80.511,113.531 ; 79.881,113.792 ccw(c79.881,114.683) JP7.1@80.511,114.053 ; 79.881,113.792 cw(c79.881,112.901) JP7.1@80.511,113.531 ; 79.881,113.792 ccw(c79.881,114.683) JP7.1@80.511,114.053 ; 79.881,113.792 cw(c79.881,112.901) JP7.1@80.511,113.531 ; 79.881,113.792 ccw(c79.881,114.683) JP7.1@80.511,114.053 ; 94.637,39.773 cw(c95.504,38.906) C7.1@95.504,40.132 ; 94.637,39.773 ccw(c93.77,40.64) C7.1@94.996,40.64 ; 94.637,39.773 cw(c95.504,38.906) C7.1@95.504,40.132 ; 94.637,39.773 ccw(c93.77,40.64) C7.1@94.996,40.64 ; 94.637,39.773 cw(c95.504,38.906) C7.1@95.504,40.132 ; 94.637,39.773 ccw(c93.77,40.64) C7.1@94.996,40.64
  Bottom Layer w0.254: U4.16@61.972,52.323 62.839,52.323 ; SW.2@64.897,101.6 64.897,74.549 66.04,73.406 66.396,73.406 ; C5.1@73.66,33.528 76.454,36.322 C2.2@76.454,40.64 73.025,44.069 73.025,72.263 U3.10@74.168,73.406 66.396,73.406 ; JP7.1@80.772,113.792 80.772,108.712 JP51.2@82.804,106.68 ; U4.16@62.604,52.157 cw(c62.839,52.074) 62.839,52.323 ; U4.16@62.604,52.157 cw(c62.839,52.074) 62.839,52.323 ; U4.16@62.604,52.157 cw(c62.839,52.074) 62.839,52.323 ; U4.16@62.604,52.489 ccw(c62.839,52.572) 62.839,52.323 ; U4.16@62.604,52.489 ccw(c62.839,52.572) 62.839,52.323 ; U4.16@62.604,52.489 ccw(c62.839,52.572) 62.839,52.323 ; 62.839,52.323 63.094,52.578 63.094,70.104 66.396,73.406 ; SW.2@64.448,101.151 cw(c63.364,100.067) 64.897,100.067 ; SW.2@64.448,101.151 cw(c63.364,100.067) 64.897,100.067 ; SW.2@64.448,101.151 cw(c63.364,100.067) 64.897,100.067 ; SW.2@64.628,101.331 cw(c63.977,100.68) 64.897,100.68 ; SW.2@64.628,101.331 cw(c63.977,100.68) 64.897,100.68 ; SW.2@64.628,101.331 cw(c63.977,100.68) 64.897,100.68 ; 64.897,100.067 cw(c66.43,100.067) SW.2@65.346,101.151 ; 64.897,100.067 cw(c66.43,100.067) SW.2@65.346,101.151 ; 64.897,100.067 cw(c66.43,100.067) SW.2@65.346,101.151 ; 64.897,100.68 cw(c65.817,100.68) SW.2@65.166,101.331 ; 64.897,100.68 cw(c65.817,100.68) SW.2@65.166,101.331 ; 64.897,100.68 cw(c65.817,100.68) SW.2@65.166,101.331 ; 72.664,73.406 cw(c72.664,71.902) U3.10@73.727,72.965 ; 72.664,73.406 ccw(c72.664,74.91) U3.10@73.727,73.847 ; 72.664,73.406 cw(c72.664,71.902) U3.10@73.727,72.965 ; 72.664,73.406 ccw(c72.664,74.91) U3.10@73.727,73.847 ; 72.664,73.406 cw(c72.664,71.902) U3.10@73.727,72.965 ; 72.664,73.406 ccw(c72.664,74.91) U3.10@73.727,73.847 ; 73.104,72.342 cw(c74.168,71.279) U3.10@74.168,72.783 ; 73.104,72.342 ccw(c72.041,73.406) U3.10@73.545,73.406 ; 73.104,72.342 cw(c74.168,71.279) U3.10@74.168,72.783 ; 73.104,72.342 ccw(c72.041,73.406) U3.10@73.545,73.406 ; 73.104,72.342 cw(c74.168,71.279) U3.10@74.168,72.783 ; 73.104,72.342 ccw(c72.041,73.406) U3.10@73.545,73.406 ; 73.277,73.406 cw(c73.277,72.515) U3.10@73.907,73.145 ; 73.277,73.406 ccw(c73.277,74.297) U3.10@73.907,73.667 ; 73.277,73.406 cw(c73.277,72.515) U3.10@73.907,73.145 ; 73.277,73.406 ccw(c73.277,74.297) U3.10@73.907,73.667 ; 73.277,73.406 cw(c73.277,72.515) U3.10@73.907,73.145 ; 73.277,73.406 ccw(c73.277,74.297) U3.10@73.907,73.667 ; 73.538,72.776 cw(c74.168,72.146) U3.10@74.168,73.037 ; 73.538,72.776 ccw(c72.908,73.406) U3.10@73.799,73.406 ; 73.538,72.776 cw(c74.168,72.146) U3.10@74.168,73.037 ; 73.538,72.776 ccw(c72.908,73.406) U3.10@73.799,73.406 ; 73.538,72.776 cw(c74.168,72.146) U3.10@74.168,73.037 ; 73.538,72.776 ccw(c72.908,73.406) U3.10@73.799,73.406 ; C5.1@73.66,34.036 ccw(c73.66,35.262) 74.527,34.395 ; C5.1@73.66,34.036 ccw(c73.66,35.262) 74.527,34.395 ; C5.1@73.66,34.036 ccw(c73.66,35.262) 74.527,34.395 ; C5.1@74.168,33.528 cw(c75.394,33.528) 74.527,34.395 ; C5.1@74.168,33.528 cw(c75.394,33.528) 74.527,34.395 ; C5.1@74.168,33.528 cw(c75.394,33.528) 74.527,34.395 ; 75.587,41.507 cw(c74.72,40.64) C2.2@75.946,40.64 ; 75.587,41.507 ccw(c76.454,42.374) C2.2@76.454,41.148 ; 75.587,41.507 cw(c74.72,40.64) C2.2@75.946,40.64 ; 75.587,41.507 ccw(c76.454,42.374) C2.2@76.454,41.148 ; 75.587,41.507 cw(c74.72,40.64) C2.2@75.946,40.64 ; 75.587,41.507 ccw(c76.454,42.374) C2.2@76.454,41.148 ; C2.2@76.095,40.281 cw(c75.228,39.414) 76.454,39.414 ; C2.2@76.095,40.281 cw(c75.228,39.414) 76.454,39.414 ; C2.2@76.095,40.281 cw(c75.228,39.414) 76.454,39.414 ; 76.454,39.414 cw(c77.68,39.414) C2.2@76.813,40.281 ; 76.454,39.414 cw(c77.68,39.414) C2.2@76.813,40.281 ; 76.454,39.414 cw(c77.68,39.414) C2.2@76.813,40.281 ; JP7.1@80.331,113.351 cw(c79.268,112.288) 80.772,112.288 ; JP7.1@80.331,113.351 cw(c79.268,112.288) 80.772,112.288 ; JP7.1@80.331,113.351 cw(c79.268,112.288) 80.772,112.288 ; JP7.1@80.511,113.531 cw(c79.881,112.901) 80.772,112.901 ; JP7.1@80.511,113.531 cw(c79.881,112.901) 80.772,112.901 ; JP7.1@80.511,113.531 cw(c79.881,112.901) 80.772,112.901 ; 80.772,112.288 cw(c82.276,112.288) JP7.1@81.213,113.351 ; 80.772,112.288 cw(c82.276,112.288) JP7.1@81.213,113.351 ; 80.772,112.288 cw(c82.276,112.288) JP7.1@81.213,113.351 ; 80.772,112.901 cw(c81.663,112.901) JP7.1@81.033,113.531 ; 80.772,112.901 cw(c81.663,112.901) JP7.1@81.033,113.531 ; 80.772,112.901 cw(c81.663,112.901) JP7.1@81.033,113.531 ; 81.74,107.744 cw(c80.677,106.68) JP51.2@82.181,106.68 ; 81.74,107.744 ccw(c82.804,108.807) JP51.2@82.804,107.303 ; 81.74,107.744 cw(c80.677,106.68) JP51.2@82.181,106.68 ; 81.74,107.744 ccw(c82.804,108.807) JP51.2@82.804,107.303 ; 81.74,107.744 cw(c80.677,106.68) JP51.2@82.181,106.68 ; 81.74,107.744 ccw(c82.804,108.807) JP51.2@82.804,107.303 ; 82.174,107.31 cw(c81.544,106.68) JP51.2@82.435,106.68 ; 82.174,107.31 ccw(c82.804,107.94) JP51.2@82.804,107.049 ; 82.174,107.31 cw(c81.544,106.68) JP51.2@82.435,106.68 ; 82.174,107.31 ccw(c82.804,107.94) JP51.2@82.804,107.049 ; 82.174,107.31 cw(c81.544,106.68) JP51.2@82.435,106.68 ; 82.174,107.31 ccw(c82.804,107.94) JP51.2@82.804,107.049
pads on no net: J61.1 J61.9 J61.10 J61.11 JP51.3 key.0 key.2 SW.0 SW.3 SW.4 SW.5 U4.11 U4.12 U4.13 U4.14
copper on no net: | length 123.6
  Top Layer w0.254: 42.674,115.569 43.18,117.094 ; 42.797,29.463 43.307,27.94 ; 42.926,117.094 43.434,117.094 ; 43.053,27.94 43.561,27.94 ; 43.231,81.049 43.18,117.094 ; 43.256,63.985 43.307,27.94 ; 43.69,115.571 43.18,117.094 ; 43.813,29.465 43.307,27.94 ; 47.878,119.38 47.88,119.888 ; 49.401,119.119 47.879,119.634 ; 49.405,120.135 47.879,119.634 ; 66.208,119.548 47.879,119.634 ; 83.779,119.466 102.108,119.38 ; 100.582,118.879 102.108,119.38 ; 100.586,119.895 102.108,119.38 ; 102.107,119.126 102.109,119.634

## Polygon pours and split planes (outlines as drawn)
no net on Top Layer (hatched 45Degree grid 0.508 track 0.203): 48.195,116.205 101.789,116.205 101.789,28.575 48.068,28.575 48.068,116.205
no net on Bottom Layer (hatched 45Degree grid 0.508 track 0.203): 48.233,116.078 101.827,116.078 101.827,28.575 48.106,28.575 48.106,116.205

## Keep-outs
Keep-Out Layer:
  lines w0.6: 47.498,28.067 102.616,27.94 ; 47.498,28.194 47.625,116.586 ; 47.625,116.84 102.362,116.967 ; 102.489,28.321 102.489,116.586

## Other copper
Top Layer:
  text "54.2296 (mm)" at 66.458,118.633 h1.52 r359.73
  text "89.1541 (mm)" at 42.318,80.793 h1.52 r270.08

## Silkscreen, mask and mechanical layers (free items; w line width, h text height)
Top Overlay:
  drawing of 661 lines, arcs and shapes, not listed
  text "AVcc" at 82.931,115.443 h0.9
  text "AREF" at 87.376,115.316 h0.9
  text "AGND" at 91.44,115.316 h0.9
  text "+5V" at 75.946,115.062 h1.22
  text "GND" at 62.611,114.935 h1.22
  text "VCC" at 50.165,107.823 h1.22
  text "GND" at 68.453,95.123 h1.52
  text "GND" at 90.805,94.742 h1.52
  text "PB0" at 68.453,92.329 h1.52
  text "PA0" at 90.805,92.202 h1.52
  text "GND" at 50.165,90.297 h1.22
  text "ATMEGA16  V2.1" at 82.55,76.835 h1.52 r90
  text "PB7" at 68.707,74.549 h1.52
  text "PA7" at 90.932,74.422 h1.52
  text "PD0" at 68.707,69.088 h1.52
  text "GND" at 90.932,68.961 h1.52
  text "PC7" at 91.059,66.167 h1.52
  text "http://www.ourhc.cn" at 100.965,63.754 h1.76 r90
  text "CTS" at 48.895,54.737 h1.02
  text "PD7" at 68.326,51.054 h1.52
  text "GND" at 68.326,48.514 h1.52
  text "PC0" at 90.932,48.514 h1.52
  text "RTS" at 48.895,46.355 h1.02
  text "DSR" at 48.895,44.323 h1.02
  text "DTR" at 48.768,36.449 h1.02

## Text inside footprints (layer, text, board x,y; h text height)
J61: Top Overlay "6" at 53.235,67.989 h1.5 r90; Top Overlay "9" at 53.235,76.299 h1.5 r90; Top Overlay "5" at 62.635,77.684 h1.5 r90; Top Overlay "1" at 62.635,66.854 h1.5 r90
JP51: Top Overlay "2" at 80.264,106.172 h1.27; Top Overlay "1" at 80.772,103.632 h1.27; Top Overlay "9" at 94.488,103.632 h1.27; Top Overlay "10" at 94.488,106.172 h1.27